# Altium PCB PCB2.PcbDoc
Units mil, origin at the board's own origin, x right, y up, seen from the top; angles counter-clockwise.
Board outline 2380 x 3440 mil, 2 copper layers (Top Layer, Bottom Layer); 16 components, 21 nets, 80 pads, 61 vias.
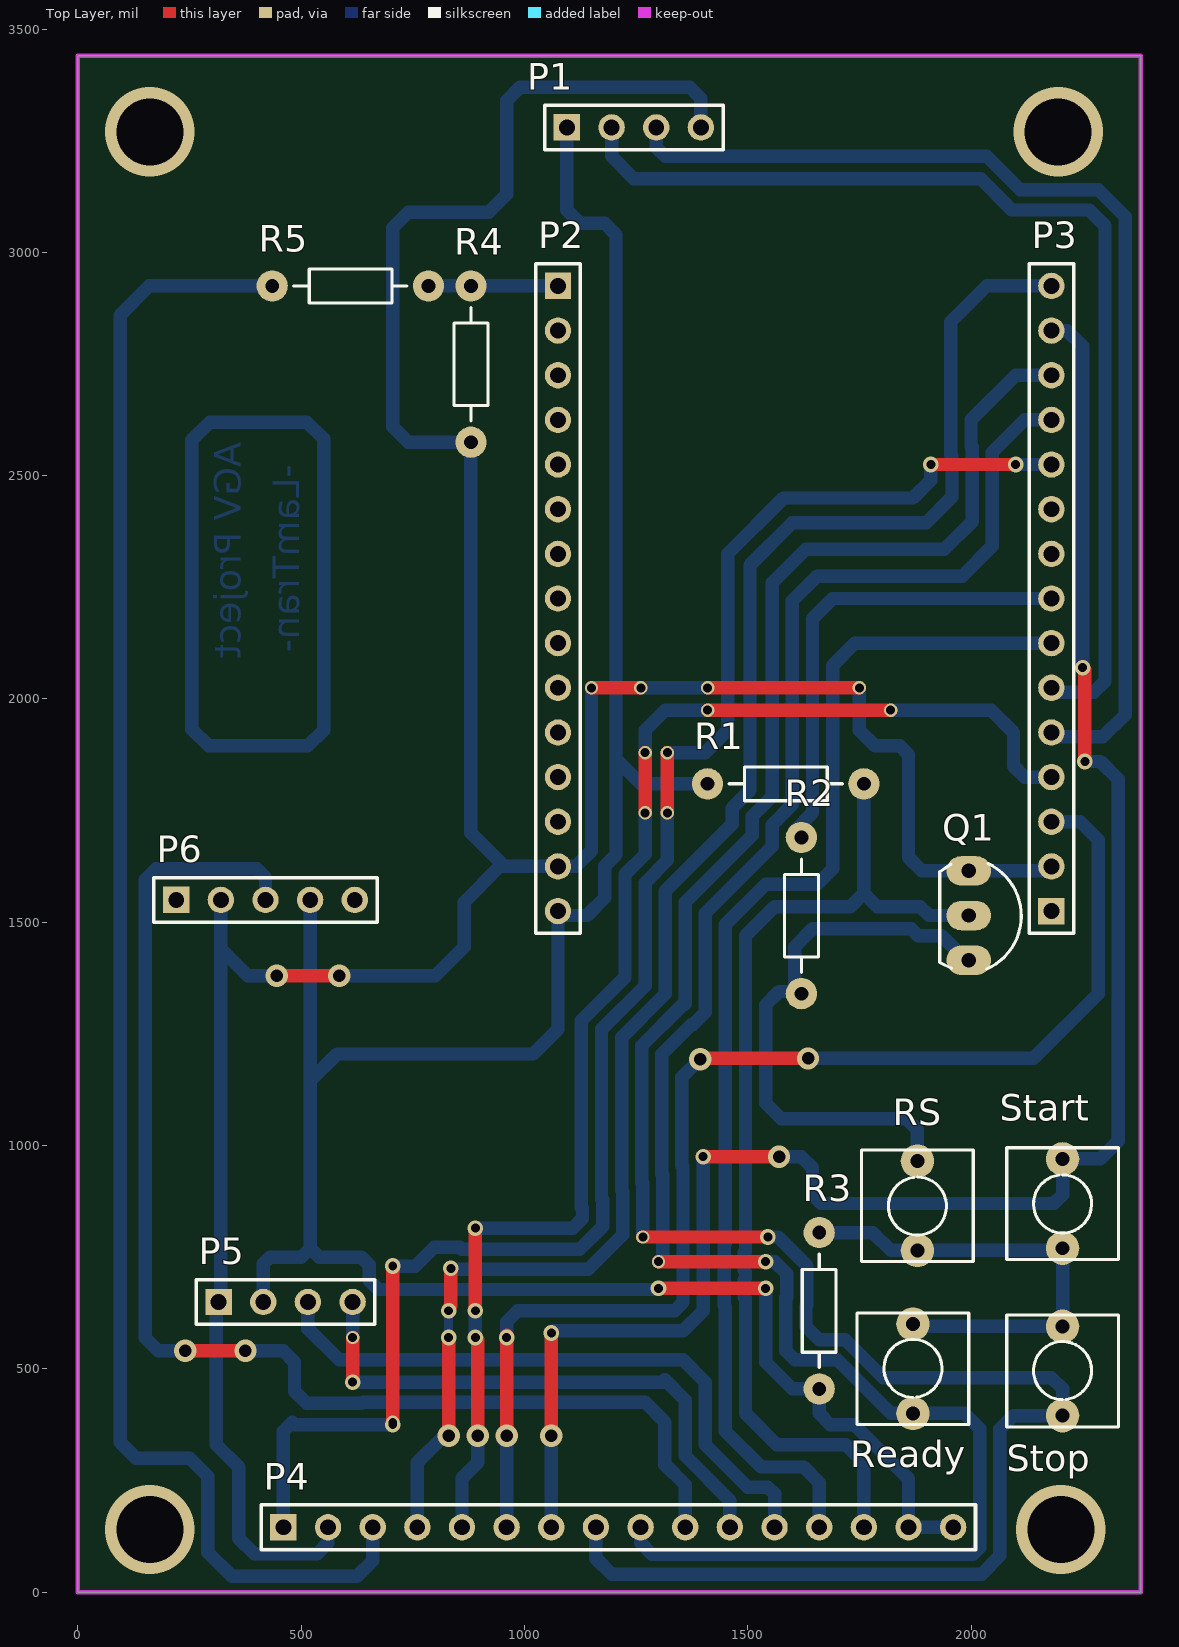
[diagram p0: Top Layer view]
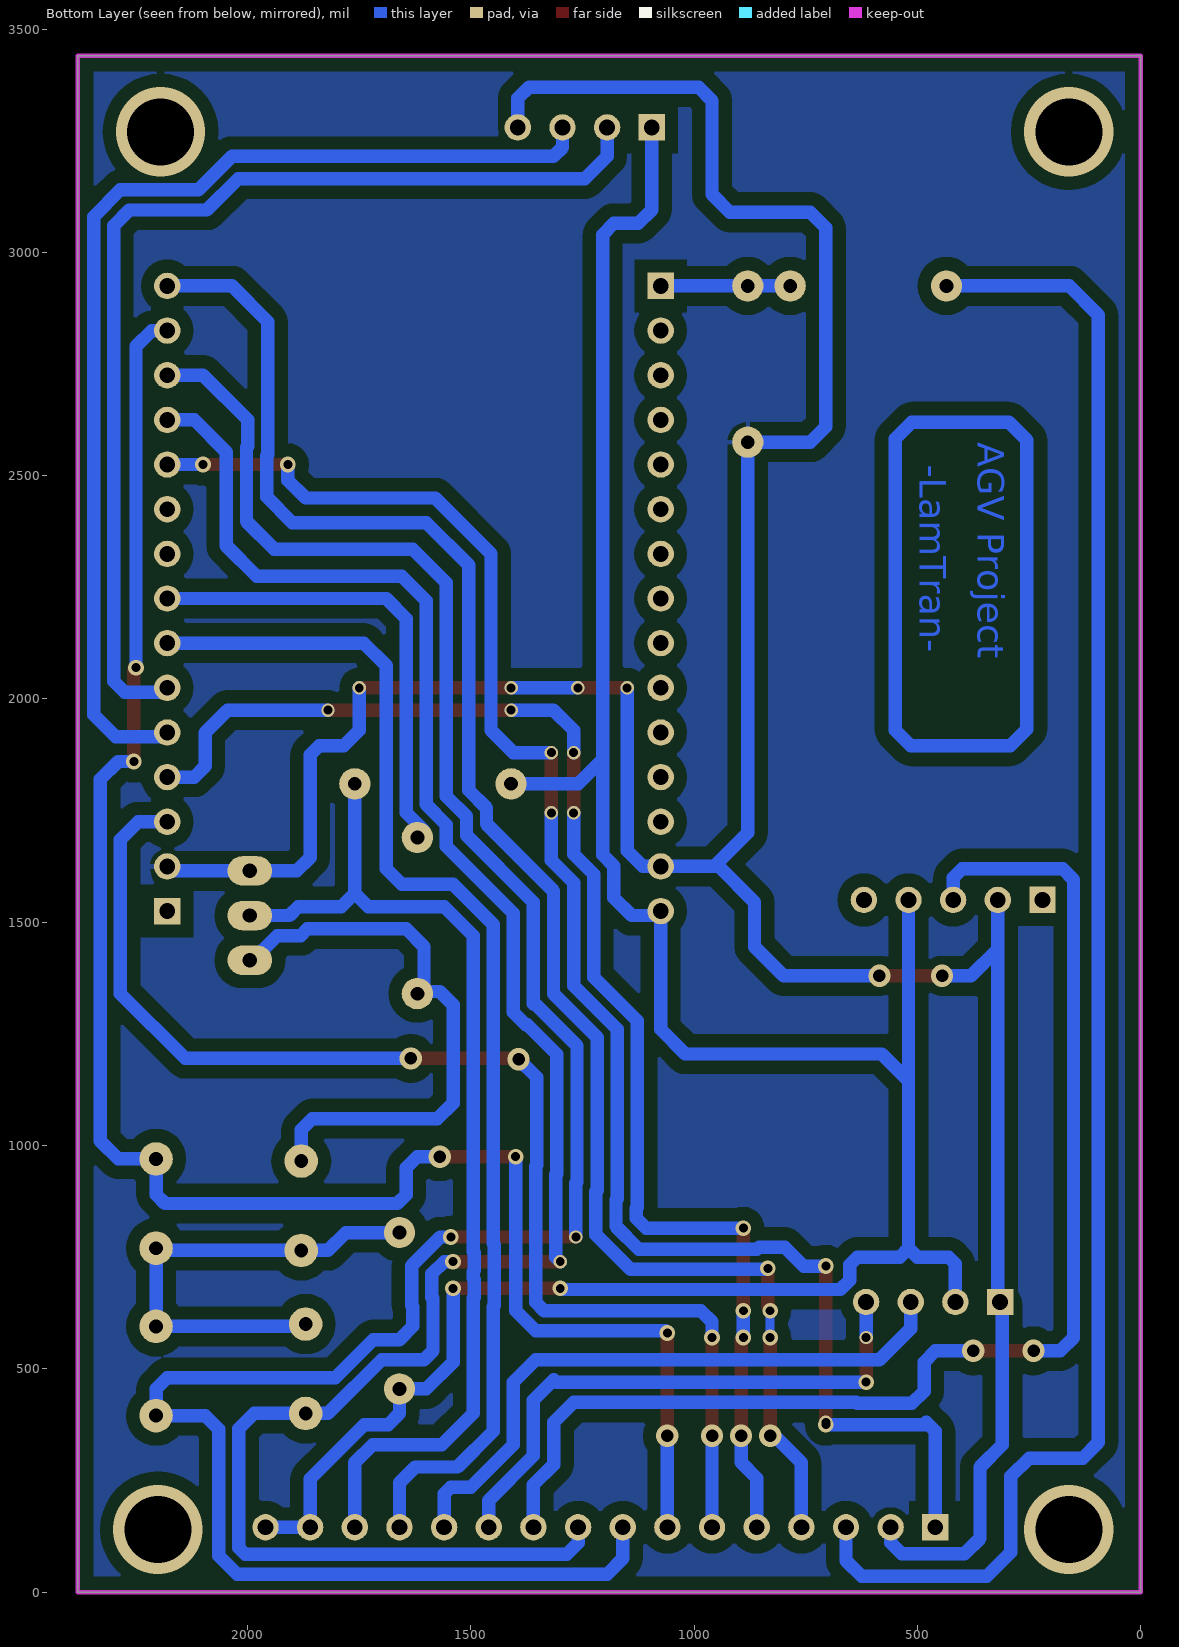
[diagram p1: Bottom Layer view, seen from below]

## Layer stack, top to bottom
Top Solder: solder mask 0.4, Solder Resist, Dk 3.5
Top Layer: signal copper 1.4
Dielectric 1: dielectric 12.6, FR-4, Dk 4.8
Bottom Layer: signal copper 1.4
Bottom Solder: solder mask 0.4, Solder Resist, Dk 3.5

## Board outline
0,0 2380,0 2380,3440 0,3440

## Design rules (kind name [scope] priority, off if disabled: settings)
Clearance [All] p1: gap=30 ignorepadtopadclearanceinfootprint=FALSE
PolygonConnect [All] p1: connectstyle=Relief reliefconductorwidth=10 reliefentries=4 polygonreliefangle="90 Angle" airgapwidth=10
RoutingVias [All] p1: holewidth=20 width=30 viastyle="Through Hole" minholewidth=20 minwidth=30 maxholewidth=20 maxwidth=30
SolderMaskExpansion [All] p1: expansion=4
Width [All] p1: maxlimit=30 minlimit=15 preferedwidth=20
30 further rules are at their usual default settings.

## Components (designator, comment, footprint, x,y, rotation, side; value= is the part's Value field where it differs from the comment)
P1 "Header 4" HDR1X4 1095,3280 r0 top
P2 "Header 15" HDR1X15 1075,2925 r270 top
P3 "Header 15" HDR1X15 2180,1525 r90 top
P4 "Header 16" HDR1X16 460,145 r0 top
P5 "Header 4" HDR1X4 314.96,649.61 r0 top
P6 "Header 5" HDR1X5 220,1550 r0 top
Q1 "C1815" QTO-92 1995,1515 r270 top
R1 "10k" R1/4W 1410,1810 r0 top value="R1/4W - 1K"
R2 "1k" R1/4W 1620,1690 r270 top value="R1/4W - 1K"
R3 "1k" R1/4W 1660,805 r270 top value="R1/4W - 1K"
R4 "20k" R1/4W 880,2925 r270 top value="R1/4W - 1K"
R5 "10k" R1/4W 435,2925 r0 top value="R1/4W - 1K"
Ready "SW" SW2 1870,600 r270 top value="SW chip 2 pin"
RS "SW" SW2 1880,765 r90 top value="SW chip 2 pin"
Start "SW" SW2 2205,770 r90 top value="SW chip 2 pin"
Stop "SW" SW2 2205,595 r270 top value="SW chip 2 pin"

## Footprints (in the part's own frame and the unit in brackets; to place one, negate y for a bottom-side part, rotate by r counter-clockwise, add the part's x,y. Pads: shape width x height; smd on the part's side, far side on the other; paste and mask are expansions set on the pad)
HDR1X4 [mm] "Connector; Header; 4 Position"
  rect 1.5x1.5 hole 0.9: 1(0,0)
  round 1.5 hole 0.9: 2(2.54,0) 3(5.08,0) 4(7.62,0)
  silkscreen extent -1.27,-1.27 8.89,1.27
HDR1X5 [mm] "Connector; Header; 5 Position"
  rect 1.5x1.5 hole 0.9: 1(0,0)
  round 1.5 hole 0.9: 2(2.54,0) 3(5.08,0) 4(7.62,0) 5(10.16,0)
  silkscreen extent -1.27,-1.27 11.43,1.27
HDR1X15 [mm] "Connector; Header; 15 Position"
  rect 1.5x1.5 hole 0.9: 1(0,0)
  round 1.5 hole 0.9: 2(2.54,0) 3(5.08,0) 4(7.62,0) 5(10.16,0) 6(12.7,0) 7(15.24,0) 8(17.78,0) 9(20.32,0) 10(22.86,0) 11(25.4,0) 12(27.94,0) 13(30.48,0) 14(33.02,0) 15(35.56,0)
  silkscreen extent -1.27,-1.27 36.83,1.27
HDR1X16 [mm] "Connector; Header; 16 Position"
  rect 1.5x1.5 hole 0.9: 1(0,0)
  round 1.5 hole 0.9: 2(2.54,0) 3(5.08,0) 4(7.62,0) 5(10.16,0) 6(12.7,0) 7(15.24,0) 8(17.78,0) 9(20.32,0) 10(22.86,0) 11(25.4,0) 12(27.94,0) 13(30.48,0) 14(33.02,0) 15(35.56,0) 16(38.1,0)
  silkscreen extent -1.27,-1.27 39.37,1.27
QTO-92 [mil] "TO-92"
  oval 66x100 hole 32: 1(-100,0) 2(0,0) 3(100,0)
  silkscreen extent -117,-65 120,118, body extent -109,-66 109,95, height 245
R1/4W [mil] "R 1/4W, 2 Pin, 350mil"
  round 70 hole 31: 1(0,0) 2(350,0)
  silkscreen extent 48,-38 302,38, body extent -40,-47 386,47, height 111
SW2 [mil] "SW button 2pin, 250x 250 mil"
  round 75 hole 31: 1(0,0) 2(200,0)
  silkscreen extent -25,-125 225,125

## Part data
P1 P5: "Header, 4-Pin", LatestRevisionDate=17-Jul-2002, LatestRevisionNote="Re-released for DXP Platform.", Publisher="Altium Limited"
P2 P3: "Header, 15-Pin", LatestRevisionDate=17-Jul-2002, LatestRevisionNote="Re-released for DXP Platform.", Publisher="Altium Limited"
P4: "Header, 16-Pin", LatestRevisionDate=17-Jul-2002, LatestRevisionNote="Re-released for DXP Platform.", Publisher="Altium Limited"
P6: "Header, 5-Pin", LatestRevisionDate=17-Jul-2002, LatestRevisionNote="Re-released for DXP Platform.", Publisher="Altium Limited"
Q1: "NPN 600mW, ECB", =C2383
R1 R2 R3 R4 R5: library part R1/4W, "Resistor 1/4W"
Ready RS Start Stop: library part SW2, "Switch button 2 pin"

## Via types
v1: diameter 35, hole 20, Top Layer to Bottom Layer, 25 vias
v2: diameter 30, hole 20, Top Layer to Bottom Layer, 21 vias
v3: diameter 50, hole 28, Top Layer to Bottom Layer, 11 vias
v4: diameter 200, hole 150, Top Layer to Bottom Layer, 4 vias

## Nets (pads, with @x,y where several pads share a name; then routed paths per layer and width w, separated by ;. In a path a pad name is that pad's centre, name@x,y a point inside that pad or via, vN(x,y) a via of type N, cw(c..) or ccw(c..) an arc to the next point about the centre after c; other vN are vias at no path point)
GND: P1.4 P2.14 P3.2 P4.2 P5.1 P6.2 Q1.1 R4.2 | length 7123.6
  Top Layer w30: v2(445,1380) v3(585,1380) ; v2(1150,2025) v2(1260.43,2025) ; v2(1410,2025) v2(1750,2025)
  Bottom Layer w30: P6.2 320,1435 ; v2(445,1380) 380,1380 325,1435 320,1435 ; P4.2 560,110 535.47,85.47 394.53,85.47 360,120 360,280 310,330 310,644.65 P5.1 320,654.65 320,1435 ; v3(585,1380) 800,1380 865,1445 865,1545 945,1625 955,1625 ; v2(1150,2025) 1150,1660 1115,1625 P2.14 955,1625 ; v2(1260.43,2025) v2(1410,2025) ; P1.4 1395,3345 1370,3370 990,3370 960,3340 960,3130 920,3090 740,3090 705,3055 705,2610 740,2575 R4.2 880,1700 955,1625 ; v2(1750,2025) 1750,1930 1785,1895 1840,1895 1860,1875 1860,1645 1890,1615 Q1.1 P3.2@2172.36,1615
  other v3: 445,1380
NetP1_1: P1.1 P2.15 P4.15 P4.16 P5.2 P6.4 R1.1 R3.2 | length 5933.1
  Top Layer w30: v1(1300,680) v1(1540,680)
  Bottom Layer w30: P5.2 414.96,734.96 430,750 500,750 520,770 ; P6.4 520,1145 ; P1.1 1095,3095 1125,3065 1180,3065 1205,3040 1205,1885 1205,1865 ; v1(1300,680) 1297.5,677.5 672.5,677.5 651.88,698.12 651.88,733.12 635,750 540,750 520,770 ; R1.1 1260,1810 1205,1865 ; v1(1540,680) 1540,515 1600,455 R3.2 1660,400 1685,375 1738.64,375 1860,253.64 P4.15 P4.16 ; 520,770 520,1145 ; 520,1145 580,1205 1020,1205 1075,1260 P2.15 1085,1515 1140,1515 1180,1555 1180,1625.92 1205,1650.92 1205,1865
NetP1_2: P1.2 P3.6 | length 2392.2
  Bottom Layer w30: P1.2 1195,3215 1245,3165 2021.36,3165 2091.36,3095 2265,3095 2300,3060 2300,2040 2275,2015 P3.6@2172.36,2015
NetP1_3: P1.3 P3.5 | length 2467.6
  Bottom Layer w30: P1.3 1295,3235 1315,3215 2035,3215 2110,3140 2285,3140 2345,3080 2345,1965 2295,1915 P3.5@2172.36,1915
NetP2_1: P2.1 R4.1 R5.2 | length 290
  Bottom Layer w30: R5.2 R4.1 P2.1
NetP3_3: P3.3 P4.6 | length 2858.1
  Top Layer w30: v3(960,350) v1(960,570) v1@960,575 ; v1(1393.31,1193.31) 1391.63,1195 v3(1635,1195)
  Bottom Layer w30: P4.6 v3(960,350) ; v1@960,575 960,605 985,630 1336.36,630 1355,648.64 1355,952.82 1352.5,955.32 1352.5,1152.5 v1(1393.31,1193.31) ; v3(1635,1195) 2140,1195 2285,1340 2285,1685 2245,1725 P3.3
  other v3: 1393.31,1193.31
NetP3_4: P3.4 P4.5 | length 3123.3
  Top Layer w30: v1(890,570) 895,565 v1(895,350) ; v1(890,630) v2(890,815) ; v2(1270,1745) v2(1270,1880) ; v2(1410,1975) v2(1820,1975)
  Bottom Layer w30: P4.5 860,255 895,290 v1(895,350) ; v1(890,570) v1(890,630) ; v2(890,815) 1107.72,815 1130,837.28 1130,859.63 1127.5,862.13 1127.5,1279.23 1225,1376.73 1225,1607.28 1270,1652.28 v2(1270,1745) ; v2(1270,1880) 1270,1930 1315,1975 v2(1410,1975) ; v2(1820,1975) 2045,1975 2095,1925 2095,1850 2120,1825 P3.4
  other v1: 890,815
  other v3: 895,350
NetP3_7: P3.7 P4.13 | length 2752.2
  Bottom Layer w30: P4.13 1660,245 1625,280 1530,280 1450,360 1450,639.19 1447.5,641.69 1447.5,778.31 1450,780.81 1450,1495 1540,1585 1655,1585 1690,1620 1690,2075 1740,2125 P3.7
NetP3_8: P3.8 R2.1 | length 1045.2
  Bottom Layer w30: R2.1@1605,1705 1645,1745 1645,2180 1690,2225 P3.8
NetP3_11: P3.11 P4.1 | length 3838.8
  Top Layer w30: v1(705,375) v2(705,730) ; v2(1320,1745) v2(1320,1880) ; v2(1910,2525) v1(2100,2525)
  Bottom Layer w30: P4.1 460,360 480,380 485,375 v1(705,375) ; v2(705,730) 755,730 797.5,772.5 854.68,772.5 859.68,767.5 1123.86,767.5 1175,818.64 1175,878.27 1172.5,880.77 1172.5,1260.59 1270,1358.09 1270,1588.64 1320,1638.64 v2(1320,1745) ; v2(1320,1880) 1405,1880 1455,1930 1455,2325 1580,2450 1870,2450 1910,2490 v2(1910,2525) ; v1(2100,2525) P3.11
  other v1: 705,730 1910,2525
  other v2: 705,380
NetP3_12: P3.12 P4.9 Ready.2 | length 4535.3
  Top Layer w30: v2(1300,740) v1(1540,740)
  Bottom Layer w30: P4.9 1260,110 1285,85 2005,85 2019.53,99.53 2019.53,365.47 1985,400 Ready.2 1820,400 1700,520 1605,520 1585,540 1585,657.82 1587.5,660.32 1587.5,712.5 1560,740 v1(1540,740) ; v2(1300,740) 1310,750 1310,934.19 1307.5,936.69 1307.5,1204.68 1373.64,1270.81 1377.18,1270.81 1405,1298.64 1405,1520 1555,1670 1555,1718.64 1600,1763.64 1600,2220 1655,2275 1980,2275 2047.5,2342.5 2047.5,2552.5 2120,2625 P3.12
NetP3_13: P3.13 P4.8 Stop.2 | length 5210.5
  Top Layer w30: v2(1265,795) v2(1545,795)
  Bottom Layer w30: P4.8 1160,75 1195,40 2023.64,40 2064.53,80.89 2064.53,364.53 2095,395 Stop.2 2205,455 2180,480 1803.64,480 1718.64,565 1660,565 1630,595 1630,639.19 1632.5,641.69 1632.5,731.14 1568.64,795 v2(1545,795) ; v2(1265,795) 1265,915.55 1262.5,918.05 1262.5,1223.31 1355,1315.81 1358.54,1315.81 1360,1317.28 1360,1545 1510,1695 1510,1737.28 1555,1782.28 1555,2260 1630,2335 1940,2335 2002.5,2397.5 2002.5,2563.31 2000,2565.81 2000,2625 2100,2725 P3.13
  other v1: 1545,795
NetP3_14: P3.14 P4.7 Start.2 | length 4172.3
  Top Layer w30: v1(1060,350) v1(1060,580) ; v1(1400,975) v1(1570,975) ; v1(2250,2070) 2255,2065 v1(2255,1860)
  Bottom Layer w30: P4.7 v1(1060,350) ; v1(1060,580) 1065,585 1355,585 1400,630 v1(1400,975) ; v1(1570,975) 1620,975 1645,950 1645,890 1665,870 2185,870 2205,890 Start.2 2290,970 2330,1010 2330,1820 2290,1860 v1(2255,1860) ; P3.14 2215,2825 2250,2790 v1(2250,2070)
  other v3: 1060,350 1570,975
NetP3_15: P3.15 P4.4 | length 3822.5
  Top Layer w30: v1(830,350) v1(830,570) ; v1(830,630) 830,635 835,640 v1(835,725)
  Bottom Layer w20: v1(830,570) v1(830,630)
  Bottom Layer w30: P4.4 760,290 820,350 v1(830,350) ; v1(835,725) 837.5,722.5 1142.5,722.5 1220,800 1220,896.91 1217.5,899.41 1217.5,1241.95 1315,1339.45 1315,1570 1465,1720 1465,1755.92 1505,1795.92 1505,2300 1600,2395 1900,2395 1957.5,2452.5 1957.5,2544.68 1955,2547.18 1955,2845 2035,2925 P3.15
  other v3: 830,350
NetP4_3: P4.3 R5.1 | length 3770.3
  Bottom Layer w30: R5.1 160,2925 95,2860 95,2585 95,355 95,335 130,300 250,300 291,259 291,89 345,35 625,35 660,70 P4.3
NetP4_10: P4.10 P6.3 | length 2900.8
  Top Layer w30: v2(240,540) v2(375,540)
  Bottom Layer w30: v2(240,540) 180,540 150.43,569.57 150.43,1595.43 175,1620 400,1620 420,1600 P6.3 ; v2(375,540) 460,540 485,515 485,450 512.5,422.5 634.68,422.5 637.18,425 1270,425 1314.53,380.47 1314.53,285.47 1360,240 P4.10
  other v3: 240,540 375,540
NetP4_11: P4.11 P5.4 | length 1271.5
  Top Layer w30: v1(615,470) v2(615,570)
  Bottom Layer w30: P5.4 v2(615,570) v2(615,570) ; v1(615,470) 1309.53,470 1314.53,475 1360,429.53 1360,305 1460,205 P4.11
NetP4_12: P4.12 P5.3 | length 1414.9
  Bottom Layer w30: P5.3 514.96,590.04 585,520 1355,520 1405,470 1405,330 1500,235 1545,235 1560,220 P4.12
NetP4_14: P4.14 Q1.2 R1.2 | length 2334.8
  Bottom Layer w30: P4.14 1760,290 1720,330 1565,330 1495,400 1495,657.82 1492.5,660.32 1492.5,699.68 1495,702.18 1495,717.82 1492.5,720.32 1492.5,759.68 1495,762.18 1495,1470 1560,1535 1730,1535 1760,1565 ; R1.2 1760,1565 ; Q1.2 1906.36,1515 1886.36,1535 1790,1535 1760,1565
NetQ1_3: Q1.3 R2.2 RS.2 | length 1259.9
  Bottom Layer w30: R2.2@1610,1345 1570,1345 1540,1315 1540,1095 1575,1060 1855,1060 1880,1035 RS.2 ; R2.2@1610,1360 1605,1365 1605,1445 1645,1485 1866.36,1485 1881.36,1470 1933.9,1470 1988.9,1415 Q1.3
NetR3_1: R3.1 Ready.1 RS.1 Start.1 Stop.1 | length 1063.6
  Bottom Layer w30: R3.1 1780,805 1820,765 RS.1 2200,765 Start.1 Stop.1 Ready.1@1880,595
pads on no net: P2.2 P2.3 P2.4 P2.5 P2.6 P2.7 P2.8 P2.9 P2.10 P2.11 P2.12 P2.13 P3.1 P3.9 P3.10 P6.1 P6.5
copper on no net: | length 1952.1
  Bottom Layer w30: 255,1932.5 292.5,1895 515,1895 550,1930 550,2582.5 512.5,2620 429.99,2620 295,2620 255,2580 255,1932.5
  other v4: 161,140 2201,140 161,3270 2195,3270

## Polygon pours and split planes (outlines as drawn)
GND on Bottom Layer "GND_L02_P008" (solid, pour order 8): 0,3435 5,3440 2380,3440 2380,0 0,0
no net on Bottom Layer "Bottom Layer-No Net" (solid, pour order 4): -5,3445
no net on Bottom Layer "Bottom Layer-No Net 1" (solid, pour order 0): 0,3440

## Keep-outs
Keep-Out Layer:
  the board outline again, w10

## Other copper
Bottom Layer:
  text "AGV Project" at 365,2575 h60 r90
  text "-LamTran-" at 495,2525 h60 r90